# Altium PCB PCB.PcbDoc
Units mm, origin at the board's own origin, x right, y up, seen from the top; angles counter-clockwise.
Board outline 127.41 x 68.58 mm, 2 copper layers (Top Layer, Bottom Layer); 68 components, 85 nets, 267 pads, 19 vias.
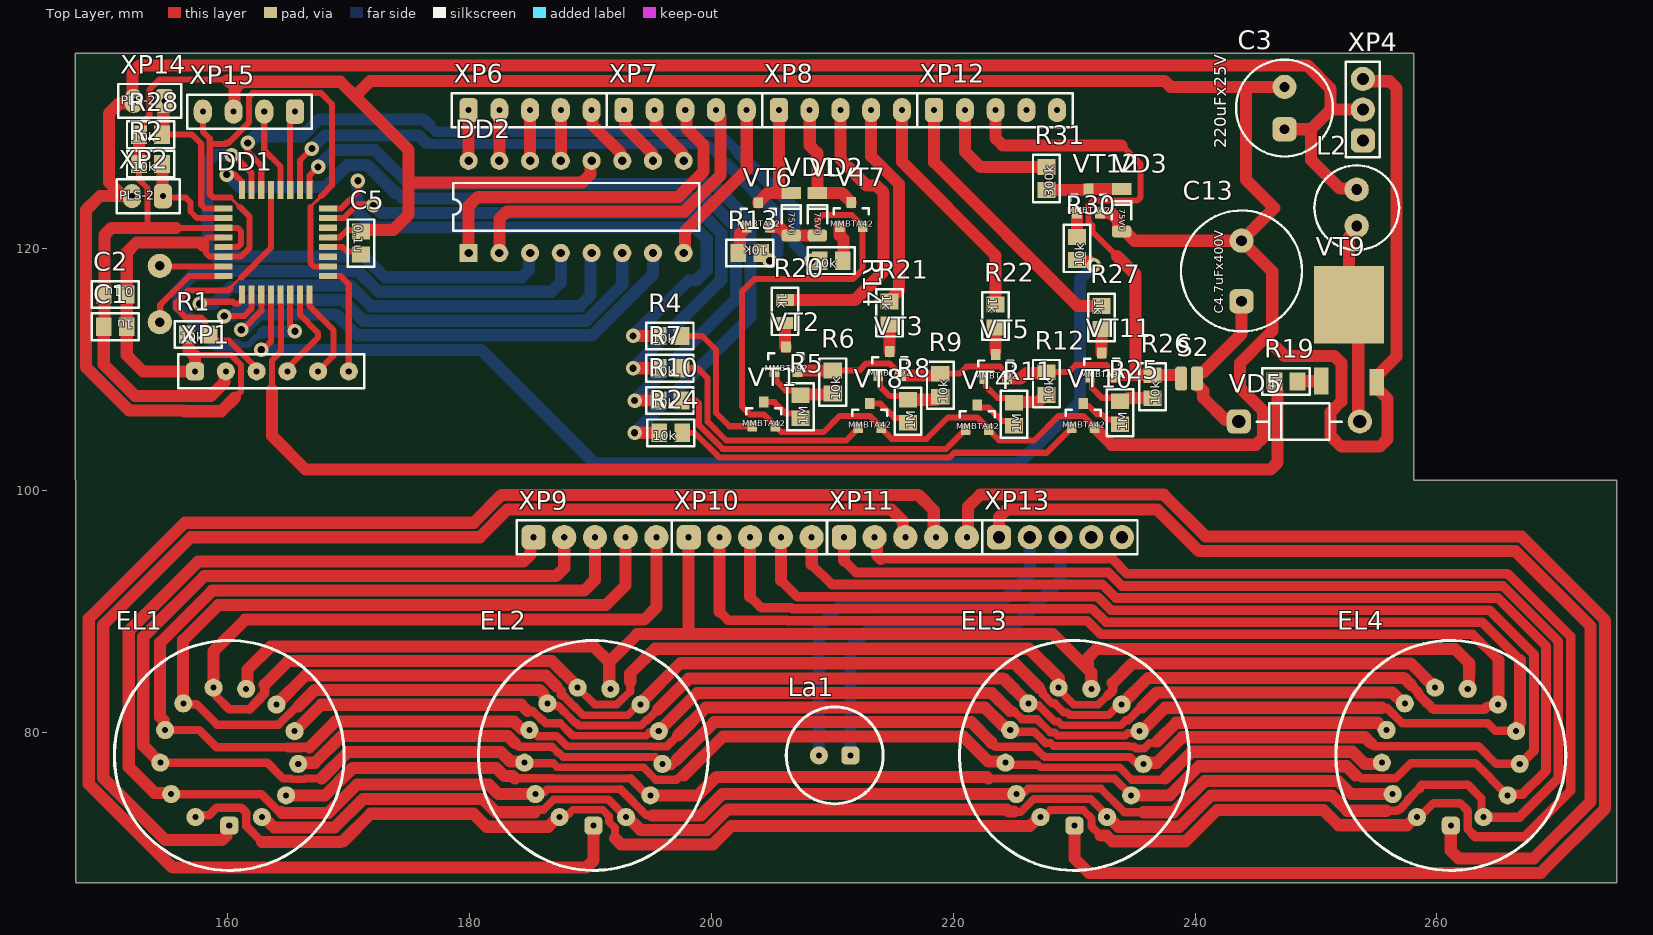
[diagram p0: Top Layer view]
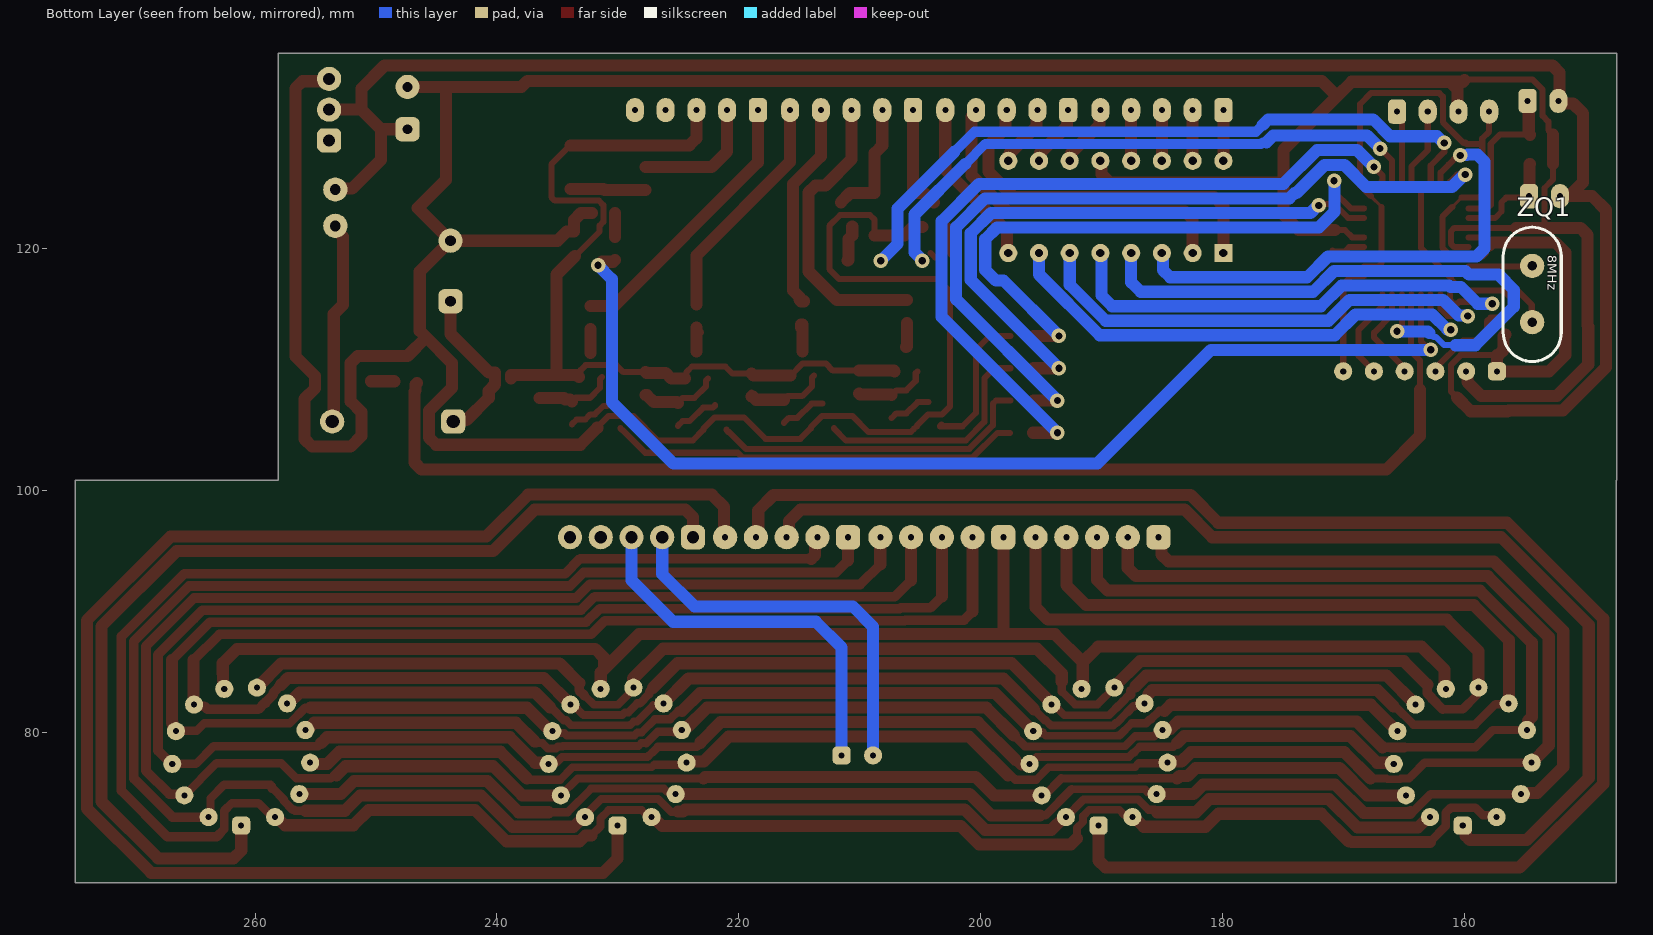
[diagram p1: Bottom Layer view, seen from below]

## Layer stack, top to bottom
Top Solder: solder mask 0.0102, Solder Resist, Dk 3.5
Top Layer: signal copper 0.0356
Dielectric 1: dielectric 0.32, FR-4, Dk 4.8
Bottom Layer: signal copper 0.0356
Bottom Solder: solder mask 0.0102, Solder Resist, Dk 3.5

## Board outline
147.476,67.567 274.857,67.567 274.857,100.841 258.064,100.841 258.064,136.144 147.447,136.144 147.447,100.838 147.476,100.841

## Design rules (kind name [scope] priority, off if disabled: settings)
Clearance [All] p1: gap=0.254 ignorepadtopadclearanceinfootprint=FALSE except(0: Arc-Hole Track-Hole SMDPad-Hole THPad-Hole Via-Hole Fill-Hole Poly-Hole Region-Hole Text-Hole; 0.2: Arc-Arc Arc-Track Arc-SMDPad Arc-THPad Arc-Via Arc-Fill Arc-Poly Arc-Region Track-Track Track-SMDPad Track-THPad Track-Via Track-Fill Track-Poly Track-Region)
PolygonConnect [All] p1: connectstyle=Relief reliefconductorwidth=0.254 reliefentries=4 polygonreliefangle="90 Angle" airgapwidth=0.254
RoomDefinition Power [InComponentClass('Power')] p1: confinementstyle=ConfineIn formatcopy=TRUE lockcomponents=FALSE outline 237.871,101.346 257.937,101.346 257.937,135.803 237.871,135.803
RoomDefinition mcu [InComponentClass('mcu')] p2: confinementstyle=ConfineIn formatcopy=TRUE lockcomponents=FALSE outline 147.574,101.219 172.339,101.219 172.339,136.017 147.574,136.017
RoomDefinition Lamps [InComponentClass('Lamps')] p3: confinementstyle=ConfineIn formatcopy=TRUE lockcomponents=FALSE outline 147.476,67.567 274.857,67.567 274.857,100.841 147.476,100.841
RoomDefinition Lamp_C_Unit [InComponentClass('Lamp_C_Unit')] p4: confinementstyle=ConfineIn formatcopy=TRUE lockcomponents=FALSE outline 172.466,101.981 237.744,101.981 237.744,135.89 172.466,135.89
RoutingVias [All] p1: holewidth=0.711 width=1.27 viastyle="Through Hole" minholewidth=0.711 minwidth=1.27 maxholewidth=0.711 maxwidth=1.27
SolderMaskExpansion [All] p1: expansion=0.102 istentingtop=FALSE
Width [All] p1: maxlimit=1 minlimit=0.2 preferedwidth=0.5 minimp=50.000000 maximp=50.000000 favimp=50.000000
30 further rules are at their usual default settings.

## Classes and differential pairs
component class Power: C3 C13 L2 R19 S2 VD5 VT9 XP4
component class mcu: C1 C2 C5 DD1 R1 R2 R28 XP1 XP2 XP14 XP15 ZQ1
component class Lamps: EL1 EL2 EL3 EL4 La1 XP9 XP10 XP11 XP13
component class Lamp_C_Unit: DD2 R4 R5 R6 R7 R8 R9 R10 R11 R12 R13 R14 R20 R21 R22 R24 R25 R26 R27 R30 R31 VD1 VD2 VD3 VT1 VT2 VT3 VT4 VT5 VT6 VT7 VT8 VT10 VT11 VT12 XP6 XP7 XP8 XP12

## Components (designator, comment, footprint, x,y, rotation, side; value= is the part's Value field where it differs from the comment)
C1 "1u" CR2012-0805#1 150.749,113.538 r180 top
C2 "0.1u" CR2012-0805#1 150.749,116.205 r180 top
C3 "220uFx25V" C8x11.5 247.396,131.612 r90 top
C5 "0.1u" CR2012-0805#1 171.069,120.457 r270 top
C13 "C4.7uFx400V" C10x16 243.84,118.15 r90 top
DD1 "ATMEGA8-16AU" *QFP80P900X900X120-32N 164.018,120.523 r0 top
DD2 "K155ID1" DIP16 179.959,119.634 r90 top
EL1 "IN-14" IN-14 160.176,78.108 r0 top
EL2 "IN-14" IN-14 190.275,78.108 r0 top
EL3 "IN-14" IN-14 230.026,78.108 r0 top
EL4 "IN-14" IN-14 261.141,78.108 r0 top
L2 "1000uH" CHOKE1 253.365,124.881 r270 top
La1 "Neon_lamp" Neon_lamp 210.214,78.108 r180 top
R1 "10k" CR2012-0805#1 157.607,112.903 r0 top
R2 "10k" CR2012-0805#1 153.67,127 r0 top
R4 "10k" CR2012-0805#1 196.596,112.776 r0 top
R5 "1M" CR2012-0805#1 207.391,106.934 r90 top
R6 "10k" CR2012-0805#1 210.058,108.966 r90 top
R7 "10k" CR2012-0805#1 196.596,110.109 r0 top
R8 "1M" CR2012-0805#1 216.281,106.553 r90 top
R9 "10k" CR2012-0805#1 218.948,108.712 r90 top
R10 "10k" CR2012-0805#1 196.596,107.442 r0 top
R11 "1M" CR2012-0805#1 225.044,106.299 r90 top
R12 "10k" CR2012-0805#1 227.711,108.839 r90 top
R13 "10k" CR2012-0805#1 203.2,119.634 r180 top
R14 "10k" CR2012-0805#1 209.931,118.999 r0 top
R19 "47" CR2012-0805#1 247.523,109.006 r0 top
R20 "1k" CR2012-0805#2 206.121,114.808 r270 top
R21 "1k" CR2012-0805#1 214.757,114.681 r270 top
R22 "1k" CR2012-0805#1 223.52,114.427 r270 top
R24 "10k" CR2012-0805#1 196.662,104.775 r0 top
R25 "1M" CR2012-0805#1 233.807,106.426 r90 top
R26 "10k" CR2012-0805#1 236.474,108.585 r90 top
R27 "1k" CR2012-0805#1 232.283,114.3 r270 top
R28 "10k" CR2012-0805#1 153.67,129.413 r0 top
R30 "10k" CR2012-0805#1 230.251,120.015 r90 top
R31 "300k" CR2012-0805#1 227.711,125.791 r90 top
S2 "JUMP2" JUMP 238.857,109.26 r0 top
VD1 "75V0" SOD-80 206.629,121.087 r90 top
VD2 "75V0" SOD-80 208.788,121.087 r90 top
VD3 "75V0" SOD-80 233.934,121.412 r90 top
VD5 "SF18" DO-41 253.619,105.704 r180 top
VT1 "MMBTA42" SOT-23 203.393,105.315 r0 top
VT2 "MMBTA92" SOT-23 205.237,109.855 r0 top
VT3 "MMBTA92" SOT-23 213.807,109.506 r0 top
VT4 "MMBTA42" SOT-23 221.046,105.061 r0 top
VT5 "MMBTA92" SOT-23 222.57,109.252 r0 top
VT6 "MMBTA42" SOT-23 202.951,121.793 r0 top
VT7 "MMBTA42" SOT-23 210.632,121.825 r0 top
VT8 "MMBTA42" SOT-23 212.156,105.188 r0 top
VT9 "FQD10N20" TO-252 250.43,109.056 r0 top
VT10 "MMBTA42" SOT-23 229.809,105.188 r0 top
VT11 "MMBTA92" SOT-23 231.333,109.379 r0 top
VT12 "MMBTA42" SOT-23 230.251,122.936 r0 top
XP1 "ISP" PLS-6 157.353,109.855 r90 top
XP2 "PLS-2" PLS-2 154.686,124.333 r270 top
XP4 "PLS-3" PLS-3 253.873,128.945 r180 top
XP6 "PLS-5" PLS-5#1 179.959,131.445 r90 top
XP7 "PLS-5" PLS-5#1 192.786,131.445 r90 top
XP8 "PLS-5" PLS-5#1 205.613,131.445 r90 top
XP9 "PLS-5" PLS-5#2 185.322,96.142 r90 top
XP10 "PLS-5" PLS-5#2 198.149,96.142 r90 top
XP11 "PLS-5" PLS-5#2 210.976,96.142 r90 top
XP12 "PLS-5" PLS-5#1 218.44,131.445 r90 top
XP13 "PLS-5" PLS-5#3 223.803,96.142 r90 top
XP14 "PLS-2" PLS-2 154.813,132.207 r270 top
XP15 "PLS-4" PLS-4 165.608,131.318 r270 top
ZQ1 "8MHz" CRYSTAL 154.432,118.569 r270 bottom

## Footprints (in the part's own frame and the unit in brackets; to place one, negate y for a bottom-side part, rotate by r counter-clockwise, add the part's x,y. Pads: shape width x height; smd on the part's side, far side on the other; paste and mask are expansions set on the pad)
*QFP80P900X900X120-32N [mil]
  rect 58x20 smd: 1(-169.87,110) 2(-169.87,79) 3(-169.87,47) 4(-169.87,16) 5(-169.87,-16) 6(-169.87,-47) 7(-169.87,-79) 8(-169.87,-110) 17(169.87,-110) 18(169.87,-79) 19(169.87,-47) 20(169.87,-16) 21(169.87,16) 22(169.87,47) 23(169.87,79) 24(169.87,110)
  rect 20x58 smd: 9(-110,-169.87) 10(-79,-169.87) 11(-47,-169.87) 12(-16,-169.87) 13(16,-169.87) 14(47,-169.87) 15(79,-169.87) 16(110,-169.87) 25(110,169.87) 26(79,169.87) 27(47,169.87) 28(16,169.87) 29(-16,169.87) 30(-47,169.87) 31(-79,169.87) 32(-110,169.87)
C8x11.5 [mm]
  rrect50% 2x2 hole 0.8: 1(-1.75,0)
  round 2 hole 0.8: 2(1.75,0)
  silkscreen extent -4,-4 4,4
C10x16 [mm]
  rrect50% 2x2 hole 0.9: 1(-2.5,0)
  round 2 hole 0.9: 2(2.5,0)
  silkscreen extent -5,-5 5,5
CHOKE1 [mm]
  round 2 hole 0.9: 1(0,0) 2(3,0)
  silkscreen extent -2,-3.5 5,3.5
CR2012-0805#1 [mm]
  rect 1.3x1.5 smd: 1(-0.95,0) 2(0.95,0)
  silkscreen extent -1.95,-1.1 1.95,1.1
CR2012-0805#2 [mm]
  rect 1x1.5 smd: 1(-0.95,0) 2(0.95,0)
  silkscreen extent -1.95,-1.1 1.95,1.1
CRYSTAL [mm]
  round 2 hole 0.8: 1(0,0) 2(4.65,0)
  silkscreen extent -3.2,-2.4 7.9,2.4
DIP16 [mm]
  rect 1.5x1.5 hole 0.7: 1(0,0)
  round 1.5 hole 0.7: 2(0,-2.54) 3(0,-5.08) 4(0,-7.62) 5(0,-10.16) 6(0,-12.7) 7(0,-15.24) 8(0,-17.78) 9(7.62,-17.78) 10(7.62,-15.24) 11(7.62,-12.7) 12(7.62,-10.16) 13(7.62,-7.62) 14(7.62,-5.08) 15(7.62,-2.54) 16(7.62,0)
  silkscreen extent 1.84,-19.05 5.78,1.27
DO-41 [mm]
  round 2 hole 1.1: 1(0,0)
  rrect50% 2x2 hole 1.1: 2(10,0)
  silkscreen extent 1.5,-1.5 8.5,1.5
IN-14 [mm]
  rrect50% 1.5x1.5 hole 0.5: 1(0,-5.8)
  round 1.5 hole 0.5: 2(-2.8,-5.1) 3(-4.8,-3.2) 4(-5.7,-0.6) 5(-5.3,2.1) 6(-3.8,4.3) 7(-1.3,5.6) 8(1.4,5.5) 9(3.9,4.2) 10(5.4,2) 11(5.7,-0.7) 12(4.7,-3.3) 13(2.7,-5.1)
  silkscreen extent -9.5,-9.5 9.5,9.5
JUMP [mm]
  rrect50% 1x2 smd: 1(0,0) 2(1.3,0)
Neon_lamp [mm]
  rrect50% 1.5x1.5 hole 0.5: 1(-1.3,0)
  round 1.5 hole 0.5: 2(1.3,0)
  silkscreen extent -4,-4 4,4
PLS-2 [mm]
  rrect50% 2x1.5 hole 0.5: 1(0,0)
  oval 2x1.5 hole 0.5: 2(0,-2.54)
  silkscreen extent -1.4,-3.82 1.4,1.4
PLS-3 [mm]
  rrect50% 2x2 hole 1: 1(0,0)
  round 2 hole 1: 2(0,-2.54) 3(0,-5.08)
  silkscreen extent -1.4,-6.5 1.4,1.4
PLS-4 [mm]
  rrect50% 2x1.5 hole 0.5: 1(0,0)
  oval 2x1.5 hole 0.5: 2(0,-2.54) 3(0,-5.08) 4(0,-7.62)
  silkscreen extent -1.4,-8.9 1.4,1.4
PLS-5#1 [mm]
  rrect50% 2x1.5 hole 0.5: 1(0,0)
  oval 2x1.5 hole 0.5: 2(0,-2.54) 3(0,-5.08) 4(0,-7.62) 5(0,-10.16)
  silkscreen extent -1.4,-11.44 1.4,1.4
PLS-5#2 [mm]
  rrect50% 2x2 hole 0.5: 1(0,0)
  round 2 hole 0.5: 2(0,-2.54) 3(0,-5.08) 4(0,-7.62) 5(0,-10.16)
  silkscreen extent -1.4,-11.44 1.4,1.4
PLS-5#3 [mm]
  rrect50% 2x2 hole 1: 1(0,0)
  round 2 hole 1: 2(0,-2.54) 3(0,-5.08) 4(0,-7.62) 5(0,-10.16)
  silkscreen extent -1.4,-11.44 1.4,1.4
PLS-6 [mm]
  rrect50% 1.5x1.5 hole 0.5: 1(0,0)
  round 1.5 hole 0.5: 2(0,-2.54) 3(0,-5.08) 4(0,-7.62) 5(0,-10.16) 6(0,-12.7)
  silkscreen extent -1.4,-13.97 1.4,1.4
SOD-80 [mm]
  rrect50% 1x1.6 smd: 1(0,0)
  rect 1x1.6 smd: 2(3.5,0)
  silkscreen extent 1,-0.8 2.5,0.8
SOT-23 [mm]
  rect 0.8x0.9 smd: 1(0,0) 2(1.9,0) 3(0.95,2)
  silkscreen extent -0.5,1 2.4,1.5
TO-252 [mm]
  rect 1.2x2.2 smd: 1(0,0) 2(4.6,-0.1)
  rect 5.8x6.4 smd: 3(2.3,6.3)

## Part data
C1: library part C0805-1u-X7R
C2 C5: library part C0805-0.1u-X7R
C3: library part "C220uFx25V YAGEO SY", "SY025M0220A3F-0811"
DD1: "AVR AVRВ® ATmega Microcontroller IC 8-Bit 16MHz 8KB _4K x 16_ FLASH 32-TQFP _7x7_", Package="TQFP-32 Microchip Technology", Availability=Unavailable, MF="Microchip Technology", MP=ATMEGA8-16AU, Price=None, SnapEDA_Link=https://www.snapeda.com/parts/ATMEGA8-16AU/Microchip/view-part/4246640/?ref=snap
L2: library part CHOKE_1
La1: Package="DO-35 Nexperia USA Inc.", Availability=Unavailable, MF="Nexperia USA Inc.", MP=1N4148, Price=None, SnapEDA_Link=https://www.snapeda.com/parts/1N4148/Nexperia%20USA%20Inc./view-part/4413009/?ref=snap
R1 R2 R4 R5 R6 R7 R8 R9 R10 R11 R12 R13 R14 R24 R25 R26 R28 R30: library part R0805-10k-5%
R19: library part R0805-47R-5%
R20 R21 R22 R27: library part R0805-1k-5%
R31: library part R0805-100k-5%
VD1 VD2 VD3: library part BZV55-C20V0
ZQ1: library part Crystal_8MHz

## Via types
v1: diameter 1.2, hole 0.6, Top Layer to Bottom Layer, 19 vias

## Nets (pads, with @x,y where several pads share a name; then routed paths per layer and width w, separated by ;. In a path a pad name is that pad's centre, name@x,y a point inside that pad or via, vN(x,y) a via of type N, cw(c..) or ccw(c..) an arc to the next point about the centre after c; other vN are vias at no path point)
1: DD1.31 DD2.3 | length 42.4
  Top Layer w0.5: v1(160.384,127.698) 160.574,127.698 161.328,126.943 161.347,126.943 162.007,126.283 162.007,124.842 DD1.31
  Bottom Layer w1: v1(160.384,127.698) 160.346,127.736 159.809,127.736 159.783,127.762 158.955,127.762 158.369,127.176 158.369,120.015 159.03,119.354 171.312,119.354 173.033,117.633 184.358,117.633 184.943,118.219 184.943,119.538 DD2.3
2: DD1.10 DD2.6 | length 41.7
  Top Layer w0.5: v1(159.766,114.427) 161.417,114.427 162.007,115.017 162.007,116.204 DD1.10
  Bottom Layer w1: v1(159.766,114.427) 159.804,114.465 160.506,114.465 161.795,115.754 169.545,115.754 171.266,114.033 189.679,114.033 192.659,117.013 DD2.6
4: DD1.11 DD2.7 | length 42.8
  Top Layer w0.5: v1@161.134,113.255 161.235,113.255 162.824,114.844 DD1.11
  Bottom Layer w1: v1(161.163,113.284) 161.201,113.322 161.463,113.322 162.695,114.554 169.037,114.554 170.758,112.833 190.176,112.833 195.199,117.856 DD2.7
8: DD1.14 DD2.4 | length 51.8
  Top Layer w0.5: DD1.14 165.212,113.553 v1(165.608,113.157)
  Bottom Layer w0.5: 160.782,112.014 161.71,112.014 162.379,112.683 162.594,112.683 162.941,113.03
  Bottom Layer w1: 160.782,112.014 159.131,112.014 155.956,115.189 155.956,116.586 157.226,117.856 159.659,117.856 159.957,118.154 170.815,118.154 172.536,116.433 186.791,116.433 187.579,117.221 DD2.4 ; 162.941,113.03 163.068,113.157 v1(165.608,113.157)
+5V: C1.1 C2.1 C3.1 DD1.4 DD1.6 DD1.18 L2.1 R1.1 XP1.1 XP2.2 XP4.2 XP14.2 XP15.4 | length 241.4
  Top Layer w0.25: 160.274,124.206 161.036,123.444 ; 166.878,123.444 167.767,124.333
  Top Layer w0.5: 157.353,111.186 160.34,111.186 161.163,110.363 161.163,108.204 160.655,107.696 ; 157.988,120.269 158.039,120.218 158.242,120.218 ; XP15.4 157.988,129.67 158.561,129.097 158.561,128.651 ; DD1.4 158.369,120.929 158.242,120.802 158.242,120.218 ; 160.274,124.206 158.854,124.206 158.561,124.499 158.561,128.651 ; 161.036,123.444 161.863,122.617 161.863,120.08 161.112,119.329 DD1.6 159.699,119.333 158.543,119.333 158.242,119.634 158.242,120.218 ; 166.878,123.444 166.878,118.809 167.167,118.52 168.329,118.52 DD1.18 ; 167.767,124.333 168.656,125.222 168.656,131.953 167.767,132.842 162.11,132.842 161.817,132.549 161.817,130.448 160.117,128.748 159.949,128.748 159.853,128.651 158.561,128.651
  Top Layer w1: XP2.2 151.384,124.333 ; R1.1 156.807,112.753 156.807,111.622 157.243,111.186 157.353,111.186 XP1.1 153.035,109.855 151.699,111.191 C1.1 C2.1 151.699,119.683 152.533,120.517 157.74,120.517 157.988,120.269 ; 160.655,107.696 159.512,106.553 156.464,106.553 156.394,106.623 151.903,106.623 148.336,110.19 148.336,123.19 149.479,124.333 151.384,124.333 ; C3.1 249.583,129.862 ; L2.1 253.286,124.96 251.968,124.96 249.583,127.345 249.583,129.862 ; XP4.2 251.206,131.485 ; 151.384,124.333 150.241,125.476 150.241,131.176 151.057,131.991 152.057,131.991 152.177,132.111 152.177,134.542 152.763,135.128 249.301,135.128 251.206,133.223 251.206,131.485 ; 249.583,129.862 251.206,131.485
+180V: R6.2 R9.2 R12.2 R26.2 S2.1 VT2.2 VT3.2 VT5.2 VT11.2 XP12.3 | length 73
  Top Layer w0.5: R6.2 212.231,109.916 212.826,110.512 214.735,110.512 215.741,109.506 VT3.2 ; R9.2 220.533,109.662 221.128,110.257 223.879,110.257 224.32,109.816 224.32,109.402 VT5.2 ; R12.2 229.55,109.789 230.124,110.363 232.664,110.363 233.083,109.944 233.083,109.529 VT11.2 ; 233.553,119.38 231.521,121.412 231.521,121.889 231.201,122.209 231.201,123.592 231.571,123.962 235.21,123.962 235.503,124.255 235.503,126.955 233.927,128.531
  Top Layer w1: VT2.2 207.198,109.916 R6.2 ; VT3.2@215.741,109.506 215.747,109.512 218.798,109.512 R9.2 ; XP12.3 223.52,129.117 224.106,128.531 233.927,128.531 ; VT5.2 225.584,109.252 226.06,109.728 227.65,109.728 R12.2 ; VT11.2 233.389,109.535 235.077,109.535 ; 233.553,119.38 235.077,117.856 235.077,109.535 ; S2.1 238.857,109.535 R26.2 235.077,109.535
A_0: R20.1 XP8.3 | length 24.4
  Top Layer w1: R20.1 211.897,115.758 214.249,118.11 214.249,124.636 213.663,125.222 212.852,125.222 210.693,127.381 XP8.3
A_0_0: EL1.1 XP11.3 | length 97.9
  Top Layer w1: EL1.1 159.926,72.058 159.926,71.459 159.59,71.123 154.888,71.123 149.762,76.249 149.762,88.903 157.001,96.142 180.877,96.142 183.163,98.428 214.898,98.428 215.865,97.461 215.865,96.333 XP11.3
A_1: R21.1 XP8.4 | length 17.3
  Top Layer w1: XP8.4 213.233,127.635 215.519,125.349 215.519,116.52 215.007,116.008 215.007,115.781 214.857,115.631 R21.1 214.63,115.631 R21.1@214.63,115.658
A_1_0: EL2.1 XP11.4 | length 138.3
  Top Layer w1: EL2.1 190.275,69.423 189.689,68.837 155.477,68.837 148.562,75.752 148.562,89.4 156.504,97.342 180.38,97.342 182.666,99.628 217.142,99.628 218.405,98.365 218.405,96.333 XP11.4
A_2: R22.1 XP8.5 | length 19.3
  Top Layer w1: XP8.5 215.773,127.167 223.52,119.42 R22.1
A_2_0: EL3.1 XP11.5 | length 124.8
  Top Layer w1: XP11.5 221.223,96.229 221.223,98.642 222.246,99.665 237.425,99.665 240.891,96.199 266.972,96.199 273.898,89.273 273.898,73.72 268.577,68.399 231.226,68.399 230.026,69.599 EL3.1
A_3: R27.1 XP12.1 | length 23.1
  Top Layer w1: XP12.1 218.44,127.127 230.317,115.25 R27.1
A_3_0: EL4.1 XP13.1 | length 85.1
  Top Layer w1: XP13.1 223.803,97.793 224.438,98.428 236.884,98.428 240.313,94.999 266.475,94.999 272.698,88.776 272.698,74.298 267.999,69.599 261.776,69.599 261.141,70.234 EL4.1
L_0: DD2.16 XP6.1 | length 4.2
  Top Layer w1: DD2.16 XP6.1
L_0_0: EL1.12 EL2.12 EL3.12 EL4.12 XP10.5 | length 187.4
  Top Layer w0.65: 186.929,76.208 193.359,76.208 ; 222.919,76.208 233.326,76.208 EL3.12
  Top Layer w0.7: 183.671,76.076 183.803,76.208 186.929,76.208 ; 193.359,76.208 194.759,74.808 EL2.12 ; 253.268,76.457 253.48,76.457 253.729,76.208 256.574,76.208 257.839,77.473 263.176,77.473 EL4.12
  Top Layer w0.8: 208.317,93.892 209.981,92.228 232.341,92.228 233.454,91.115 265.036,91.115 269.015,87.136 269.015,76.838 267.081,74.904 EL4.12@265.937,74.904
  Top Layer w1: EL1.12 168.098,74.808 170.359,77.069 182.251,77.069 182.917,76.404 183.598,76.404 183.798,76.203 ; EL2.12 198.913,74.808 200.435,76.33 222.797,76.33 222.919,76.208 ; XP10.5 208.317,96.134 208.317,93.892 ; EL3.12 237.912,74.808 240.313,77.209 252.516,77.209 253.268,76.457 ; EL4.12 EL4.12@265.937,74.904
L_1: DD2.15 XP6.2 | length 4.2
  Top Layer w1: DD2.15 XP6.2
L_1_0: EL1.3 EL2.3 EL3.3 EL4.3 XP9.1 | length 160.3
  Top Layer w0.65: 186.241,75.108 186.447,75.314 192.508,75.314 ; EL3.3 225.389,75.071 225.916,75.071 226.203,75.358 232.215,75.358 234.164,73.409
  Top Layer w0.7: EL1.3 162.815,74.908 164.314,73.409 164.494,73.409 ; EL2.3 185.628,75.061 186.194,75.061 186.241,75.108 ; 192.508,75.314 194.667,73.155 195.101,73.155 ; 234.164,73.409 235.741,73.409
  Top Layer w1: EL1.3 155.281,75.004 154.01,75.004 151.864,77.149 151.864,88.384 157.608,94.128 184.486,94.128 185.072,94.714 185.072,95.892 XP9.1 ; 164.494,73.409 164.545,73.358 168.38,73.358 170.717,75.695 181.639,75.695 182.426,74.908 EL2.3 ; 195.101,73.155 199.165,73.155 200.943,74.933 225.201,74.933 EL3.3 ; 235.741,73.409 238.21,73.409 240.786,75.985 251.835,75.985 252.911,74.908 EL4.3
L_2: DD2.8 XP7.5 | length 14
  Top Layer w1: DD2.8 197.835,119.73 197.835,121.416 202.946,126.527 XP7.5
L_2_0: EL1.4 EL2.4 EL3.4 EL4.4 XP9.2 | length 158.4
  Top Layer w0.65: 164.367,76.457 164.621,76.203 165.278,76.203 165.348,76.133 166.404,76.133 166.474,76.203 167.796,76.203 ; 186.937,77.473 187.277,77.133 194.412,77.133 195.437,76.108 ; 226.877,77.355 226.983,77.355 227.205,77.133 233.751,77.133 234.776,76.108
  Top Layer w0.7: EL1.4 163.316,77.508 164.367,76.457 ; EL2.4 184.61,77.473 186.937,77.473 ; 195.437,76.108 197.165,76.108 197.514,76.457 197.768,76.457 ; EL3.4 224.479,77.355 226.877,77.355 ; 234.776,76.108 237.424,76.108 237.519,76.203
  Top Layer w1: EL1.4 153.064,78.92 153.064,87.887 158.105,92.928 187.188,92.928 187.862,93.602 XP9.2 ; 167.796,76.203 169.967,78.374 182.643,78.374 183.414,77.604 184.48,77.604 EL2.4 ; 197.768,76.457 200.969,79.658 220.856,79.658 222.911,77.604 224.231,77.604 EL3.4 ; 237.519,76.203 239.725,78.409 253.013,78.409 254.029,77.393 254.049,77.412 255.346,77.412 EL4.4
L_3: DD2.9 XP7.2 | length 5.2
  Top Layer w1: XP7.2 195.422,131.349 195.422,130.079 197.643,127.858 197.643,127.35 DD2.9
L_3_0: EL1.5 EL2.5 EL3.5 EL4.5 XP9.3 | length 156.1
  Top Layer w0.65: 187.248,79.708 188.086,78.87 195.11,78.87 195.147,78.833 196.203,78.833 196.24,78.87 196.371,78.87 ; 227.653,79.124 228.071,79.124 228.296,78.899 234.532,78.899 234.598,78.833 234.979,78.833 235.129,78.683 235.804,78.683 236.245,79.124 236.757,79.124
  Top Layer w0.7: EL1.5 157.695,80.208 159.117,78.786 164.989,78.786 ; EL2.5@184.983,80.055 185.345,80.055 185.692,79.708 187.248,79.708 ; 196.371,78.87 197.26,79.759 ; EL3.5@225.393,80.074 226.703,80.074 227.653,79.124 ; 236.757,79.124 236.884,79.251
  Top Layer w0.8: 164.989,78.786 165.017,78.758 166.135,78.758 166.163,78.786 166.823,78.786 ; EL3.5 224.86,80.074 EL3.5@225.393,80.074
  Top Layer w1: EL1.5 154.781,80.304 154.781,80.964 154.461,81.283 154.461,87.425 158.764,91.728 189.513,91.728 190.402,92.617 XP9.3 ; 166.823,78.786 168.939,80.902 183.717,80.902 184.316,80.304 184.88,80.304 EL2.5 ; 197.26,79.759 199.559,82.058 222.647,82.058 224.247,80.458 224.341,80.458 224.591,80.208 EL3.5 ; 236.884,79.251 238.443,80.81 255.104,80.81 255.706,80.208 EL4.5
L_4: DD2.13 XP6.4 | length 4.2
  Top Layer w1: DD2.13 XP6.4
L_4_0: EL1.6 EL2.6 EL3.6 EL4.6 XP9.4 | length 155.8
  Top Layer w0.65: 187.897,81.675 188.797,80.775 188.868,80.775 189.06,80.583 194.216,80.583 194.641,81.008 ; 227.068,82.255 228.421,80.902 228.697,80.902 229,80.599 233.885,80.599 234.294,81.008
  Top Layer w0.7: EL1.6 156.437,82.347 157.461,82.347 159.16,80.648 164.255,80.648 165.779,82.172 165.891,82.172 ; EL2.6 186.628,82.255 187.176,82.255 187.274,82.157 187.415,82.157 187.897,81.675 ; 194.641,81.008 194.714,81.008 195.609,81.904 195.609,81.918 ; EL3.6 226.379,82.255 227.068,82.255 ; 234.294,81.008 234.465,81.008 235.548,82.091 235.606,82.091
  Top Layer w1: EL1.6 156.366,82.418 156.366,87.633 159.261,90.528 191.291,90.528 192.942,92.179 XP9.4 ; 165.891,82.172 167.218,83.499 185.835,83.499 186.146,83.188 ; 195.609,81.918 198.149,84.458 224.176,84.458 EL3.6 ; 235.606,82.091 235.614,82.083 236.847,83.315 256.299,83.315 257.206,82.408 EL4.6
L_5: DD2.14 XP6.3 | length 4.2
  Top Layer w1: DD2.14 XP6.3
L_5_0: EL1.7 EL2.7 EL3.7 EL4.7 XP9.5 | length 160.3
  Top Layer w0.65: EL2.7 190.375,82.308 192.214,82.308 193.271,83.365 ; EL3.7@228.756,83.543 230,82.299 231.985,82.299 232.735,83.049
  Top Layer w0.7: EL1.7@159.029,83.555 159.029,83.065 160.176,81.918 161.827,81.918 ; 193.323,83.365 193.323,84.204 ; 232.735,83.049 232.776,83.049
  Top Layer w0.8: 161.827,81.918 162.726,82.817 162.726,82.867 163.097,83.238 163.097,83.95 ; 232.776,83.049 232.776,83.067 233.201,83.492 233.201,84.077
  Top Layer w1: EL1.7@159.029,83.555 EL1.7 158.876,86.714 161.49,89.328 194.466,89.328 195.482,90.344 XP9.5 ; 163.097,83.95 165.046,85.899 186.848,85.899 188.975,83.772 EL2.7 ; 193.323,84.204 193.323,84.888 195.363,86.928 226.286,86.928 228.756,84.458 EL3.7@228.756,83.543 ; 233.201,84.077 234.839,85.715 257.834,85.715 EL4.7
L_6: DD2.11 XP6.5 | length 5.2
  Top Layer w1: XP6.5 190.215,131.349 190.215,130.206 192.563,127.858 192.563,127.35 DD2.11
L_6_0: EL1.8 EL2.8 EL3.8 EL4.8 XP10.1 | length 122
  Top Layer w1: EL1.8 161.672,83.704 161.672,85.192 163.579,87.099 190.301,87.099 191.58,85.821 ; EL2.8 191.58,83.704 191.58,85.821 ; XP10.1 198.149,88.128 ; 231.169,85.22 231.169,86.202 231.882,86.915 261.478,86.915 262.665,85.728 262.665,84.9 262.637,84.871 262.637,83.704 EL4.8 ; EL3.8 231.423,83.611 231.423,84.966 228.261,88.128 198.149,88.128 ; 191.58,85.821 193.887,88.128 198.149,88.128
L_7: DD2.10 XP7.1 | length 5.2
  Top Layer w1: XP7.1 192.873,131.358 192.873,130.131 195.103,127.9 195.103,127.35 DD2.10
L_7_0: EL1.9 EL2.9 EL3.9 EL4.9 XP10.2 | length 185.8
  Top Layer w0.65: 188.853,81.992 189.412,81.433 193.111,81.433 EL2.9@193.986,82.308 ; 228.393,82.408 229.137,81.664 229.433,81.664 229.648,81.449 232.859,81.449 EL3.9@233.718,82.308
  Top Layer w0.7: 187.227,83.823 187.625,83.425 ; 187.625,83.149 187.717,83.057 187.788,83.057 188.27,82.575 188.853,81.992 ; 227.105,83.696 227.426,83.375 227.426,83.17 228.188,82.408 228.393,82.408 ; EL3.9@233.718,82.308 EL3.9
  Top Layer w0.8: 187.625,83.149 187.625,83.425 ; EL2.9@193.986,82.308 EL2.9@194.173,82.308 ; 200.689,89.997 201.402,89.284 206.23,89.284 206.286,89.228 231.098,89.228 232.211,88.115 262.945,88.115 265.078,85.982 ; 257.839,83.95 258.491,83.298 258.491,83.149 259.109,82.531 259.109,82.426 259.214,82.426 259.722,81.918 263.935,81.918 264.191,82.174 EL4.9@265.025,82.174
  Top Layer w1: EL1.9 166.467,84.699 186.351,84.699 187.227,83.823 ; EL2.9@194.173,82.308 EL2.9 194.175,82.443 197.46,85.728 225.073,85.728 227.105,83.696 ; 200.689,89.997 XP10.2 ; EL3.9 236.133,84.515 257.274,84.515 257.839,83.95 ; EL4.9@265.025,82.174 265.078,82.227 265.078,85.982
L_8: DD2.1 XP7.3 | length 30.2
  Top Layer w1: DD2.1 179.959,123.514 180.721,124.276 197.301,124.276 199.39,126.365 199.39,128.524 197.962,129.952 197.962,131.349 XP7.3
L_8_0: EL1.10 EL2.10 EL3.10 EL4.10 XP10.3 | length 183.7
  Top Layer w0.65: 187.524,80.775 188.54,79.759 188.682,79.759 188.708,79.733 194.639,79.733 194.88,79.974 ; 226.942,81.108 228.037,80.013 228.384,80.013 228.648,79.749 234.237,79.749 234.442,79.953 235.271,79.953 EL3.10
  Top Layer w0.7: 184.814,81.791 185.254,81.791 185.937,81.108 186.005,81.108 186.338,80.775 187.524,80.775 ; 194.88,79.974 EL2.10@194.951,79.974 ; 224.692,81.791 225.005,81.791 225.688,81.108 226.942,81.108 ; 255.426,82.045 255.843,82.045 257.113,80.775 264.189,80.775 264.824,80.14 EL4.10@266.382,80.14
  Top Layer w0.8: EL2.10@194.951,79.974 195.541,79.974 EL2.10 ; 203.229,91.246 204.175,90.3 206.628,90.3 206.7,90.228 231.512,90.228 232.625,89.115 263.723,89.115 266.856,85.982
  Top Layer w1: EL1.10 167.767,82.299 184.306,82.299 184.814,81.791 ; EL2.10 198.825,83.258 223.225,83.258 224.692,81.791 ; 203.229,91.246 XP10.3 ; EL3.10@235.832,80.358 237.519,82.045 255.426,82.045 ; EL4.10@266.382,80.14 266.438,80.14 266.791,80.493 266.791,80.712 266.856,80.777 266.856,85.982
L_9: DD2.2 XP7.4 | length 28.1
  Top Layer w1: DD2.2 182.499,122.441 183.134,123.076 197.798,123.076 200.787,126.065 200.787,130.929 200.406,131.31 XP7.4
L_9_0: EL1.11 EL2.11 EL3.11 EL4.11 XP10.4 | length 184.8
  Top Layer w0.65: 186.875,78.808 187.321,78.362 187.392,78.362 187.771,77.983 195.42,77.983 ; 227.143,78.362 227.178,78.362 227.557,77.983 234.627,77.983 234.916,77.694
  Top Layer w0.7: 183.798,79.124 184.114,78.808 186.875,78.808 ; 223.168,79.124 223.484,78.808 226.697,78.808 227.143,78.362 ; 234.916,77.694 235.049,77.561 235.573,77.561 EL3.11 ; 254.537,79.124 254.791,78.87 263.427,78.87 264.889,77.408 EL4.11@266.717,77.408
  Top Layer w0.8: EL2.11@195.952,77.274 195.975,77.251 196.657,77.251 197.133,77.727 ; 205.769,92.573 207.114,91.228 231.927,91.228 233.04,90.115 264.339,90.115 265.043,89.411 268.015,86.439 268.015,78.505 EL4.11@266.918,77.408
  Top Layer w1: EL1.11 165.972,77.504 167.249,77.504 169.447,79.702 183.22,79.702 183.798,79.124 ; 197.133,77.727 200.264,80.858 221.517,80.858 223.168,79.207 223.168,79.124 ; 205.769,92.573 XP10.4 ; EL3.11 235.822,77.504 236.834,77.504 238.939,79.609 254.052,79.609 254.537,79.124 ; EL4.11@266.717,77.408 EL4.11@266.918,77.408
L_point: DD1.26 R13.1 | length 50
  Top Layer w0.5: DD1.26 166.025,127.29 v1(167.005,128.27) ; R13.1@203.798,119.282 R13.1
  Bottom Layer w0.8: 176.403,128.778 176.704,128.778 176.84,128.642 199.653,128.642 201.295,127
  Bottom Layer w1: v1(167.005,128.27) 168.078,129.343 175.838,129.343 176.403,128.778 ; 201.295,127 205.486,122.809 205.486,119.688 204.851,119.053 v1(204.851,118.999)
Lamp_0: DD1.24 R4.1 | length 49.4
  Top Layer w0.5: DD1.24@168.815,123.317 DD1.24 168.337,123.321 169.422,123.321 170.815,124.714 v1@170.815,125.222
  Top Layer w1: v1(193.548,112.776) R4.1
  Bottom Layer w1: v1(170.815,125.603) 170.777,125.565 170.777,123.041 172.069,121.749 198.672,121.749 199.644,120.777 199.644,118.237 198.755,117.348 198.12,117.348 v1(193.548,112.776)
Lamp_1: DD1.23 R7.1 | length 49.7
  Top Layer w0.5: DD1.23@168.337,122.534 DD1.23 169.647,122.53 170.815,123.698 v1@171.577,123.698
  Top Layer w1: v1(193.548,110.109) R7.1
  Bottom Layer w1: v1(172.085,123.571) 172.139,123.571 172.761,122.949 199.169,122.949 200.844,121.274 200.844,117.405 v1(193.548,110.109)
Lamp_2: DD1.32 R10.1 | length 67.3
  Top Layer w0.5: v1(159.977,126.12) 160.646,126.12 161.22,125.546 161.22,124.842 DD1.32
  Top Layer w1: v1(193.675,107.442) R10.1
  Bottom Layer w1: v1(159.977,126.12) 160.031,126.12 161.056,125.095 168.148,125.095 169.956,126.903 171.604,126.903 173.92,124.587 174.071,124.587 174.509,124.149 199.666,124.149 202.044,121.771 202.044,115.811 v1(193.675,107.442)
Lamp_3: DD1.25 R24.1 | length 65.2
  Top Layer w0.5: DD1.25@166.878,125.541 166.816,125.479 166.816,124.842 DD1.25 166.812,126.045 v1(167.513,126.746)
  Top Layer w1: v1(193.675,104.775) R24.1
  Bottom Layer w1: v1(167.513,126.746) 168.91,128.143 172.212,128.143 175.006,125.349 200.163,125.349 203.244,122.268 203.244,114.344 v1(193.675,104.775)
Left_P: VD1.2 VT6.3 XP8.1 | length 9
  Top Layer w1: VT6.3 204.695,124.587 205.662,124.587 205.613,124.636 XP8.1
Left_P_0: EL1.2 EL2.2 EL3.2 EL4.2 XP11.2 | length 202.8
  Top Layer w0.65: EL2.2 187.638,73.171 188.132,73.171 188.575,73.614 191.037,73.614 191.55,73.101 191.55,72.63 192.053,72.127 192.053,71.25 ; EL3.2 227.456,73.008 228.031,73.583 230.774,73.583 231.451,72.906 231.451,72.238 232.185,71.504
  Top Layer w0.7: EL1.2 157.529,73.161 158.505,73.161 159.131,73.787 161.166,73.787 161.576,73.377 161.576,72.263 162.881,70.958 ; EL4.2@258.206,73.008 EL4.2 258.558,73.008 259.721,74.171 261.903,74.171 262.538,73.536 262.538,72.012 262.919,71.631
  Top Layer w0.8: 214.024,94.364 233.128,94.364 234.371,93.121 265.859,93.121 271.047,87.933 271.047,75.187 267.237,71.377 263.173,71.377 262.919,71.631
  Top Layer w1: 162.881,70.958 169.385,70.958 169.42,70.993 169.571,70.993 171.86,73.282 180.369,73.282 181.442,72.209 186.541,72.209 187.34,73.008 EL2.2 ; 192.053,71.25 192.548,70.755 200.159,70.755 201.67,72.266 214.176,72.266 214.184,72.258 226.341,72.258 227.091,73.008 EL3.2 ; XP11.2 213.708,95.951 213.708,94.681 214.024,94.364 ; 232.185,71.504 232.669,71.504 233.164,71.009 239.229,71.009 241.805,73.585 250.622,73.585 251.87,72.336 257.534,72.336 EL4.2@258.206,73.008
N+180: La1.1 XP13.3 | length 32.1
  Bottom Layer w1: La1.1 211.514,87.028 213.643,89.157 225.454,89.157 228.883,92.586 XP13.3
N_L: R31.2 XP12.2 | length 10.7
  Top Layer w1: XP12.2 220.98,128.016 222.255,126.741 R31.2
N_L_0: La1.2 XP13.2 | length 32.9
  Bottom Layer w1: La1.2 208.914,88.746 210.595,90.427 223.676,90.427 226.343,93.094 XP13.2
N_L_C: DD1.12 R30.1 | length 91.7
  Top Layer w0.5: v1@163.068,111.76 163.612,112.304 DD1.12
  Top Layer w1: R30.1 230.401,118.915 231.297,118.915 231.594,118.618 v1(231.648,118.618)
  Bottom Layer w1: v1(162.814,111.633) 180.975,111.633 190.373,102.235 225.425,102.235 230.505,107.315 230.505,117.475 v1(231.648,118.618)
NetC5_2: C5.2 DD1.20 | length 2.8
  Top Layer w0.5: DD1.20 169.57,120.117 169.926,119.761 170.876,119.761 C5.2@170.942,119.827
NetC13_1: C13.1 S2.2 VD5.2 | length 14.3
  Top Layer w1: C13.1 243.84,112.943 240.657,109.76 240.157,109.76 240.157,108.76 240.681,108.236 240.681,107.671 242.521,105.831 244,105.831 VD5.2@244.127,105.704
NetDD1_1: DD1.1 R28.2 XP14.1 | length 13.3
  Top Layer w0.5: R28.2 157.099,129.413 157.861,128.651 157.861,123.61 158.154,123.317 DD1.1
  Top Layer w1: R28.2 154.717,129.509 XP14.1@154.717,132.111
NetDD1_2: DD1.2 R2.2 XP2.1 | length 8.9
  Top Layer w0.5: XP2.1@154.653,124.366 XP2.1 154.813,124.206 156.591,124.206 156.972,123.825 156.972,123.063 157.505,122.53 DD1.2
  Top Layer w1: R2.2 154.653,126.967 XP2.1@154.653,124.366
NetDD1_7: DD1.7 ZQ1.1 | length 5.3
  Top Layer w0.5: ZQ1.1@154.498,118.315 154.699,118.516 DD1.7
NetDD1_8: DD1.8 ZQ1.2 | length 7.7
  Top Layer w0.5: ZQ1.2 154.471,113.958 154.471,115.355 156.845,117.729 DD1.8
NetDD1_15: DD1.15 XP1.4 | length 8
  Top Layer w0.5: XP1.4 164.973,110.109 167.496,112.632 167.496,113.047 166.029,114.514 166.029,116.204 DD1.15
NetDD1_16: DD1.16 XP1.5 | length 7.7
  Top Layer w0.5: DD1.16 166.816,116.204 166.816,115.251 168.783,113.284 168.783,111.125 XP1.5
NetDD1_17: DD1.17 XP1.6 | length 9.2
  Top Layer w0.5: DD1.17 168.337,117.725 169.379,117.725 170.053,117.051 XP1.6
NetDD1_27: DD1.27 XP15.1 | length 7
  Top Layer w0.5: DD1.27 XP15.1@165.212,131.811
NetDD1_28: DD1.28 XP15.2 | length 7
  Top Layer w0.5: XP15.2 163.068,128.143 164.424,126.787 DD1.28
NetDD1_29: DD1.29 R1.2 XP1.3 | length 24.4
  Top Layer w0.2: 160.274,116.713 160.274,116.767 ; 161.109,117.602 161.163,117.602
  Top Layer w0.25: 160.274,116.767 161.109,117.602
  Top Layer w0.5: 160.274,116.713 160.083,116.522 156.781,116.522 155.782,115.523 155.782,115.109 156.591,114.3 157.861,114.3 158.177,113.984 158.177,113.283 R1.2 158.557,112.803 158.957,112.403 160.139,112.403 162.433,110.109 XP1.3 ; 161.163,117.602 163.612,120.051 DD1.29
NetL2_2: L2.2 VD5.1 VT9.3 | length 16.8
  Top Layer w1: L2.2 253.365,121.61 252.73,120.975 VT9.3 253.492,114.594 253.492,105.831 VD5.1
NetR4_2: R4.2 VT1.1 | length 12.2
  Top Layer w0.5: R4.2 199.263,112.776 200.409,111.63 200.409,106.426 201.52,105.315 VT1.1 VT1.1@203.243,105.465
NetR5_1: R5.1 VT1.3 | length 3.6
  Top Layer w0.5: VT1.3 205.232,107.315 206.163,106.384 206.991,106.384 R5.1
NetR5_2: R5.2 R6.1 VT2.1 | length 6.1
  Top Layer w0.5: VT2.1 205.387,109.705 205.387,109.065 206.168,108.284 206.991,108.284 R5.2 ; R6.1 R6.1@210.075,107.999
  Top Layer w1: R5.2 207.457,107.95 209.992,107.95 R6.1
NetR7_2: R7.2 VT8.1 | length 19.7
  Top Layer w0.5: R7.2 198.882,110.109 199.709,109.282 199.709,105.674 201.243,104.14 211.158,104.14 212.156,105.138 VT8.1
NetR8_1: R8.1 VT8.3 | length 3.8
  Top Layer w0.5: VT8.3 213.995,107.188 215.18,106.003 215.881,106.003 R8.1
NetR8_2: R8.2 R9.1 VT3.1 | length 6.6
  Top Layer w0.5: VT3.1 213.957,109.356 213.957,108.623 214.781,107.799 215.985,107.799 R8.2 ; R9.1@218.948,108.082 R9.1@219.045,107.986
  Top Layer w1: R8.2 218.589,107.503 218.848,107.762 R9.1
NetR10_2: R10.2 VT4.1 | length 26.9
  Top Layer w0.5: R10.2 198.755,107.442 199.009,107.188 199.009,105.384 200.953,103.44 219.425,103.44 220.846,104.861 220.896,104.861 221.046,105.011 VT4.1
NetR11_1: R11.1 VT4.3 | length 3.8
  Top Layer w0.5: VT4.3 221.996,107.011 222.146,106.861 222.958,106.861 224.07,105.749 224.644,105.749 R11.1
NetR11_2: R11.2 R12.1 VT5.1 | length 6.5
  Top Layer w0.5: VT5.1 222.72,109.102 222.72,108.623 223.694,107.649 224.644,107.649 R11.2
  Top Layer w1: R11.2 225.11,107.315 227.037,107.315 227.611,107.889 R12.1
NetR13_2: R13.2 VT6.1 | length 2.6
  Top Layer w0.5: R13.2@202.153,119.73 R13.2
  Top Layer w1: R13.2 202.4,119.784 202.4,121.242 VT6.1
NetR14_2: R14.2 VT7.1 | length 3
  Top Layer w1: VT7.1 210.632,121.092 210.947,120.777 210.947,119.06 R14.2@211.008,118.999
NetR19_2: R19.2 VT9.1 | length 2
  Top Layer w1: R19.2 248.498,109.031 250.405,109.031 VT9.1
NetR20_2: R20.2 VT2.3 | length 2
  Top Layer w1: R20.2 206.121,111.921 VT2.3
NetR21_2: R21.2 VT3.3 | length 2.8
  Top Layer w0.3: R21.2@214.503,113.731 R21.2@214.757,113.477
  Top Layer w1: VT3.3 214.757,113.477 R21.2 ; R21.2@214.884,113.477 R21.2@214.884,113.731
NetR22_2: R22.2 VT5.3 | length 2.8
  Top Layer w0.5: R22.2@223.12,113.077 R22.2 ; VT5.3 223.52,111.302 VT5.3@223.67,111.452
  Top Layer w1: VT5.3@223.52,111.506 223.52,113.077 R22.2
NetR24_2: R24.2 VT10.1 | length 34.1
  Top Layer w0.5: R24.2 198.628,104.775 200.663,102.74 219.715,102.74 220.099,103.124 227.745,103.124 229.609,104.988 229.659,104.988 229.809,105.138 VT10.1
NetR25_1: R25.1 VT10.3 | length 3.8
  Top Layer w0.5: VT10.3 230.759,107.138 230.909,106.988 231.213,106.988 231.902,106.299 232.283,106.299 232.706,105.876 233.407,105.876 R25.1
NetR25_2: R25.2 R26.1 VT11.1 | length 6.5
  Top Layer w0.5: VT11.1 231.483,109.229 231.483,108.496 232.307,107.672 233.511,107.672 R25.2
  Top Layer w1: R25.2 233.957,107.526 234.357,107.526 234.466,107.635 R26.1
NetR27_2: R27.2 VT11.3 | length 2
  Top Layer w1: VT11.3 R27.2
NetR30_2: R30.2 VT12.1 | length 2
  Top Layer w1: R30.2 VT12.1
NetR31_1: R31.1 VD3.2 VT12.3 | length 6.3
  Top Layer w1: R31.1 231.106,124.841 VT12.3 231.61,124.936 231.634,124.912 VD3.2
PWM_1: DD1.13 R19.1 | length 103.2
  Top Layer w0.5: 163.703,108.331 163.703,110.744 164.435,111.476 164.435,115.561 164.428,115.567 164.428,116.204 DD1.13
  Top Layer w1: 163.703,108.331 163.703,104.521 166.497,101.727 246.232,101.727 246.818,102.313 246.818,108.17 246.723,108.265 246.723,108.756 R19.1@246.596,108.883
R_point: DD1.30 R14.1 | length 58.3
  Top Layer w0.5: v1(161.695,128.729) 161.695,127.992 162.82,126.867 162.82,124.842 DD1.30
  Bottom Layer w0.85: 176.726,130.206 177.265,129.667 200.533,129.667 202.184,128.016
  Bottom Layer w1: v1(161.695,128.729) 161.749,128.729 162.307,129.286 166.183,129.286 167.58,130.683 176.249,130.683 176.726,130.206 ; 202.184,128.016 206.883,123.317 206.883,120.396 v1(208.28,118.999)
Right_P: VD2.2 VT7.3 XP8.2 | length 10.2
  Top Layer w1: XP8.2 208.153,128.524 208.788,127.889 VD2.2 210.82,124.587 VT7.3
Right_P_0: EL1.13 EL2.13 EL3.13 EL4.13 XP11.1 | length 193.6
  Top Layer w0.65: 186.143,73.608 186.999,74.464 191.519,74.464 EL2.13 ; 225.073,73.409 225.581,73.409 226.68,74.508 231.379,74.508 232.726,73.161 EL3.13 ; 258.601,75.568 258.728,75.695
  Top Layer w0.7: 185.449,73.409 185.648,73.608 186.143,73.608 ; 255.807,73.536 256.696,73.536 256.768,73.608 256.88,73.608 257.641,74.37 257.641,74.481 258.525,75.365 258.601,75.365 258.601,75.568 ; 258.728,75.695 262.538,75.695 263.679,74.555 EL4.13@263.679,73.171
  Top Layer w0.8: 210.976,94.237 211.985,93.228 232.85,93.228 233.963,92.115 265.451,92.115 270.015,87.551 270.015,76.187 266.836,73.008 EL4.13 EL4.13@263.679,73.171
  Top Layer w1: EL1.13 163.012,73.008 163.862,72.158 168.888,72.158 171.225,74.495 181.142,74.495 182.228,73.409 185.449,73.409 ; EL2.13 193.111,73.008 194.164,71.955 199.662,71.955 201.347,73.64 224.444,73.64 224.626,73.458 225.024,73.458 ; 210.976,94.237 XP11.1 ; EL3.13 232.862,73.008 233.661,72.209 238.732,72.209 241.308,74.785 251.338,74.785 252.586,73.536 255.807,73.536
SGND: C1.2 C2.2 C3.2 C5.1 C13.2 DD1.3 DD1.5 DD1.21 DD2.12 R2.1 R28.1 VD1.1 VD2.1 VD3.1 VT1.2 VT4.2 VT6.2 VT7.2 VT8.2 VT9.2 VT10.2 VT12.2 XP1.2 XP4.3 XP15.3 | length 365.1
  Top Layer w0.5: R2.1 152.72,125.706 153.416,125.01 153.416,121.844 153.289,121.717 ; R28.1 153.1,129.793 153.1,130.494 153.577,130.971 153.577,133.138 154.424,133.985 160.02,133.985 ; 155.778,121.717 DD1.3 159.707,121.713 160.862,121.713 161.163,121.412 161.163,120.409 160.874,120.121 159.707,120.121 DD1.5 ; XP15.3@160.337,131.509 XP15.3 ; DD1.21 168.337,120.933 169.32,120.933 169.926,121.539 C5.1@170.754,121.539 ; VT1.2 205.293,105.365 204.359,106.299 203.2,106.299 202.565,106.934 202.565,116.459 203.581,117.475 211.709,117.475 212.532,118.298 VT7.2 212.532,121.875 211.632,122.775 209.174,122.775 208.788,122.389 VD2.1 ; VT1.2@205.527,105.115 205.802,104.84 209.296,104.84 210.628,106.172 213.122,106.172 214.056,105.238 VT8.2 214.056,105.138 214.927,104.267 217.805,104.267 219.583,106.045 222.012,106.045 222.946,105.111 VT4.2 222.946,105.011 223.817,104.14 226.695,104.14 228.727,106.172 230.775,106.172 231.709,105.238 VT10.2
  Top Layer w1: C1.2 149.799,110.424 152.4,107.823 158.647,107.823 159.797,108.974 159.797,109.759 XP1.2 ; C1.2@149.86,113.665 149.86,116.205 149.86,121.131 150.446,121.717 153.289,121.717 155.778,121.717 ; R2.1 R28.1 ; 160.02,133.928 160.156,133.792 161.241,133.792 ; XP15.3@160.337,131.509 160.624,131.796 160.624,133.175 161.241,133.792 ; C5.1@170.754,121.539 173.736,121.539 175.006,122.809 175.006,125.476 ; DD2.12 190.023,127.158 190.023,126.142 189.357,125.476 175.006,125.476 ; VT6.2 205.623,121.793 206.329,121.087 VD1.1 VD2.1 ; VT10.2 231.709,105.184 233.108,103.785 245.032,103.785 245.618,104.371 245.618,106.593 243.713,108.498 243.713,110.53 245.852,112.669 ; VT12.2 233.048,122.936 233.634,122.35 233.634,121.412 234.234,121.412 234.996,120.65 C13.2 ; C3.2 244.221,133.362 ; XP4.3 254.064,133.834 256.081,133.834 256.667,133.248 256.667,111.093 255.03,109.456 VT9.2 255.03,108.456 255.905,107.581 255.905,104.267 255.27,103.632 252.095,103.632 251.206,104.521 251.206,106.483 252.095,107.372 252.095,110.539 251.509,111.125 247.396,111.125 245.852,112.669 ; 161.241,133.792 169.357,133.792 170.561,132.588 ; 170.561,132.588 175.006,128.143 175.006,125.476 ; 170.561,132.588 171.831,133.858 237.49,133.858 237.986,133.362 244.221,133.362 ; C13.2 246.38,118.11 246.38,113.197 245.852,112.669 ; C13.2 246.547,123.357 244.221,125.683 244.221,133.362
  Bottom Layer w1: C3.2 C3.2@247.587,133.171
VCC_D: DD1.9 DD2.5 | length 41.8
  Top Layer w0.5: v1(157.734,115.443) 157.895,115.604 160.455,115.604 160.616,115.443 160.941,115.443 161.224,115.726 DD1.9
  Bottom Layer w1: v1(157.734,115.443) 158.944,115.443 160.341,116.84 161.183,116.84 161.297,116.954 170.18,116.954 171.901,115.233 189.147,115.233 190.023,116.109 190.023,119.538 DD2.5
pads on no net: DD1.19 DD1.22 XP4.1 XP12.4 XP12.5 XP13.4 XP13.5

## Silkscreen, mask and mechanical layers (free items; w line width, h text height)
Mechanical 1:
  lines w0.2: 258.064,100.841 274.857,100.841 ; 274.857,100.841 147.476,100.841 147.476,67.567 274.857,67.567 274.857,100.841 ; 147.447,100.838 147.447,136.144 258.064,136.144 258.064,100.838 147.447,100.838